# Altium PCB GROUND_MOTION.PCBDOC
Units mm, origin at the board's own origin, x right, y up, seen from the top; angles counter-clockwise.
Board outline 40 x 44.58 mm, 2 copper layers (Top Layer, Bottom Layer); 41 components, 0 nets, 162 pads, 57 vias.
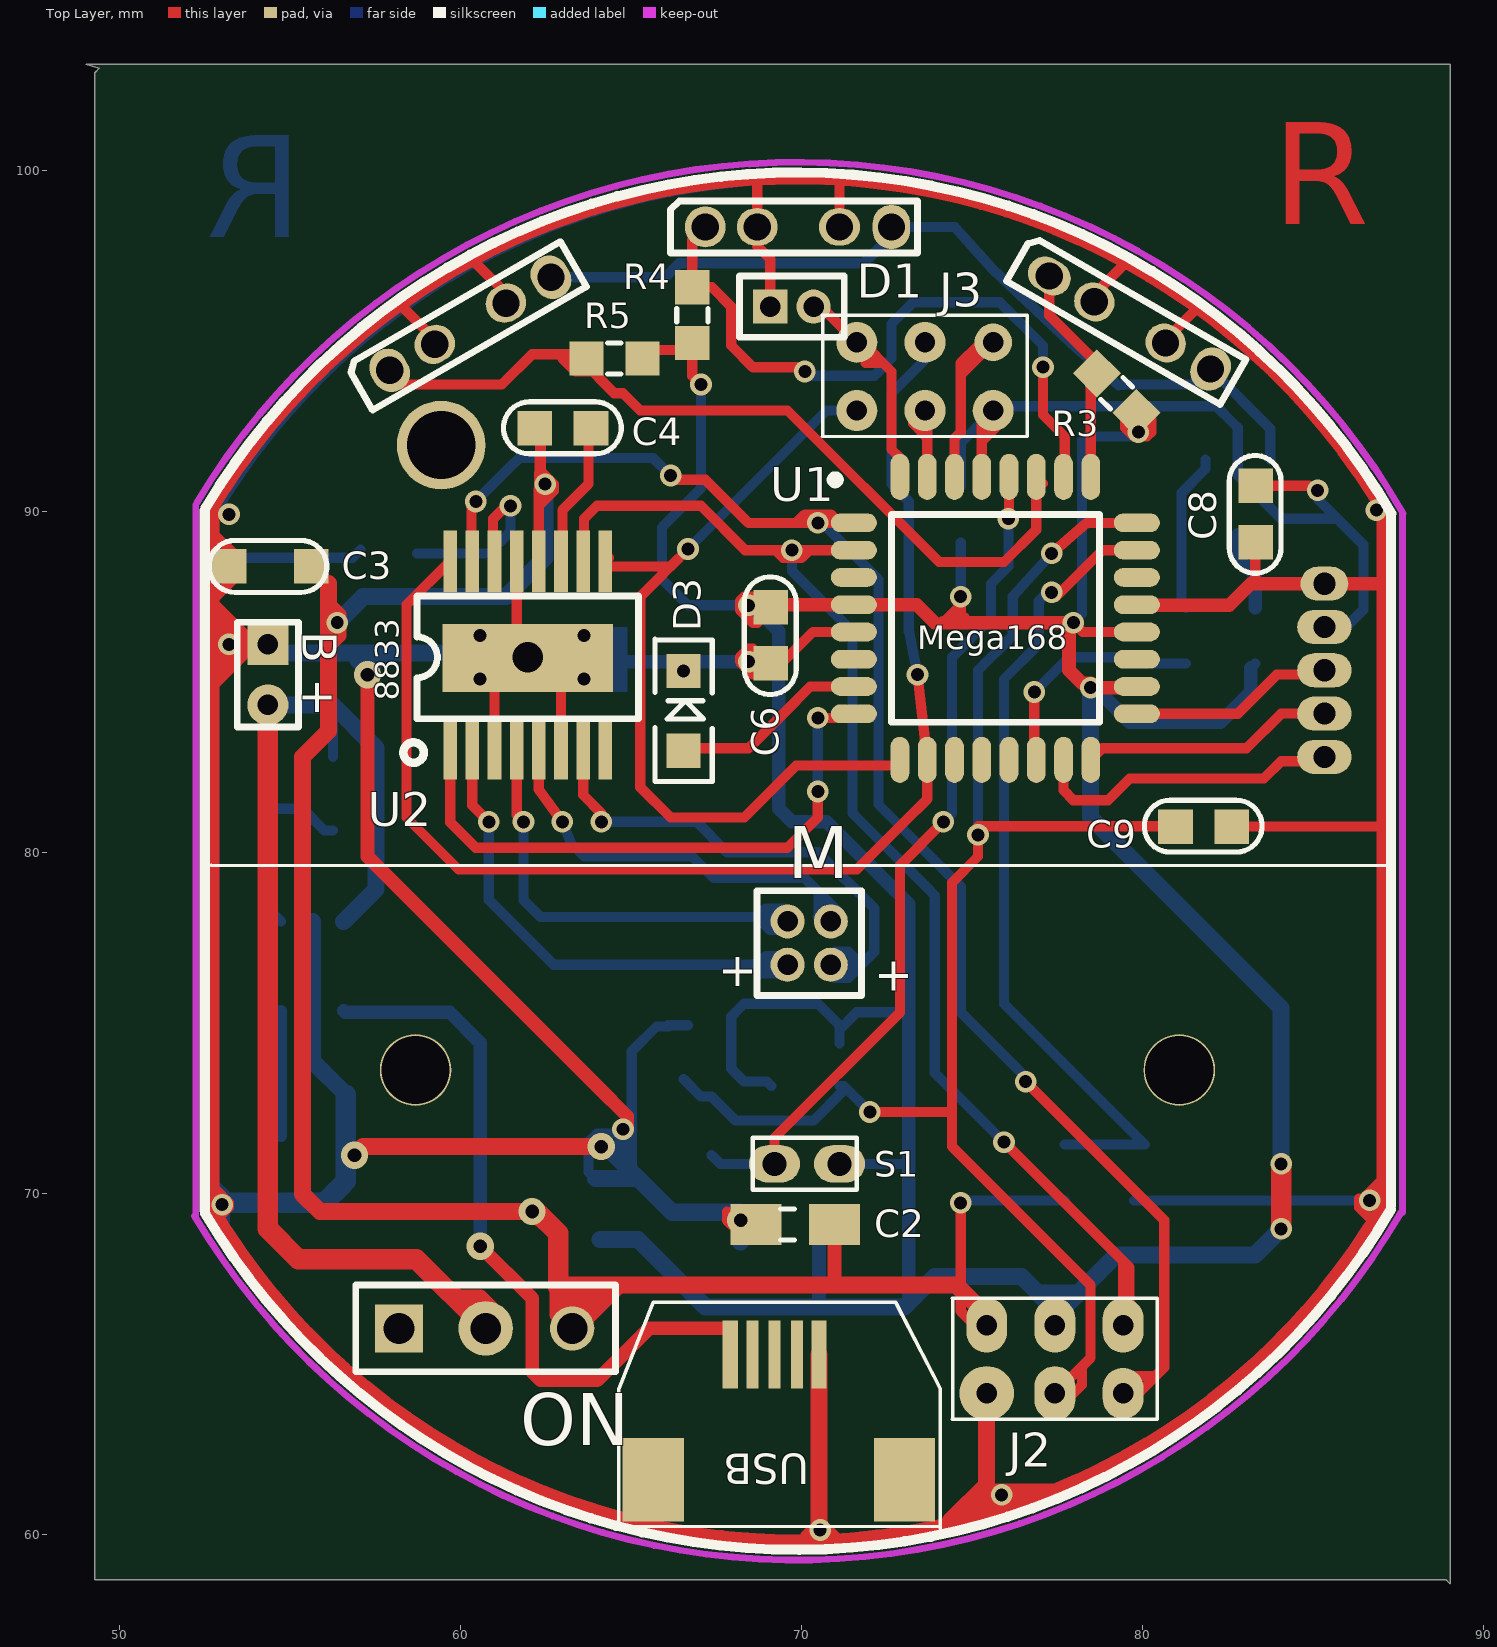
[diagram p0: Top Layer view]
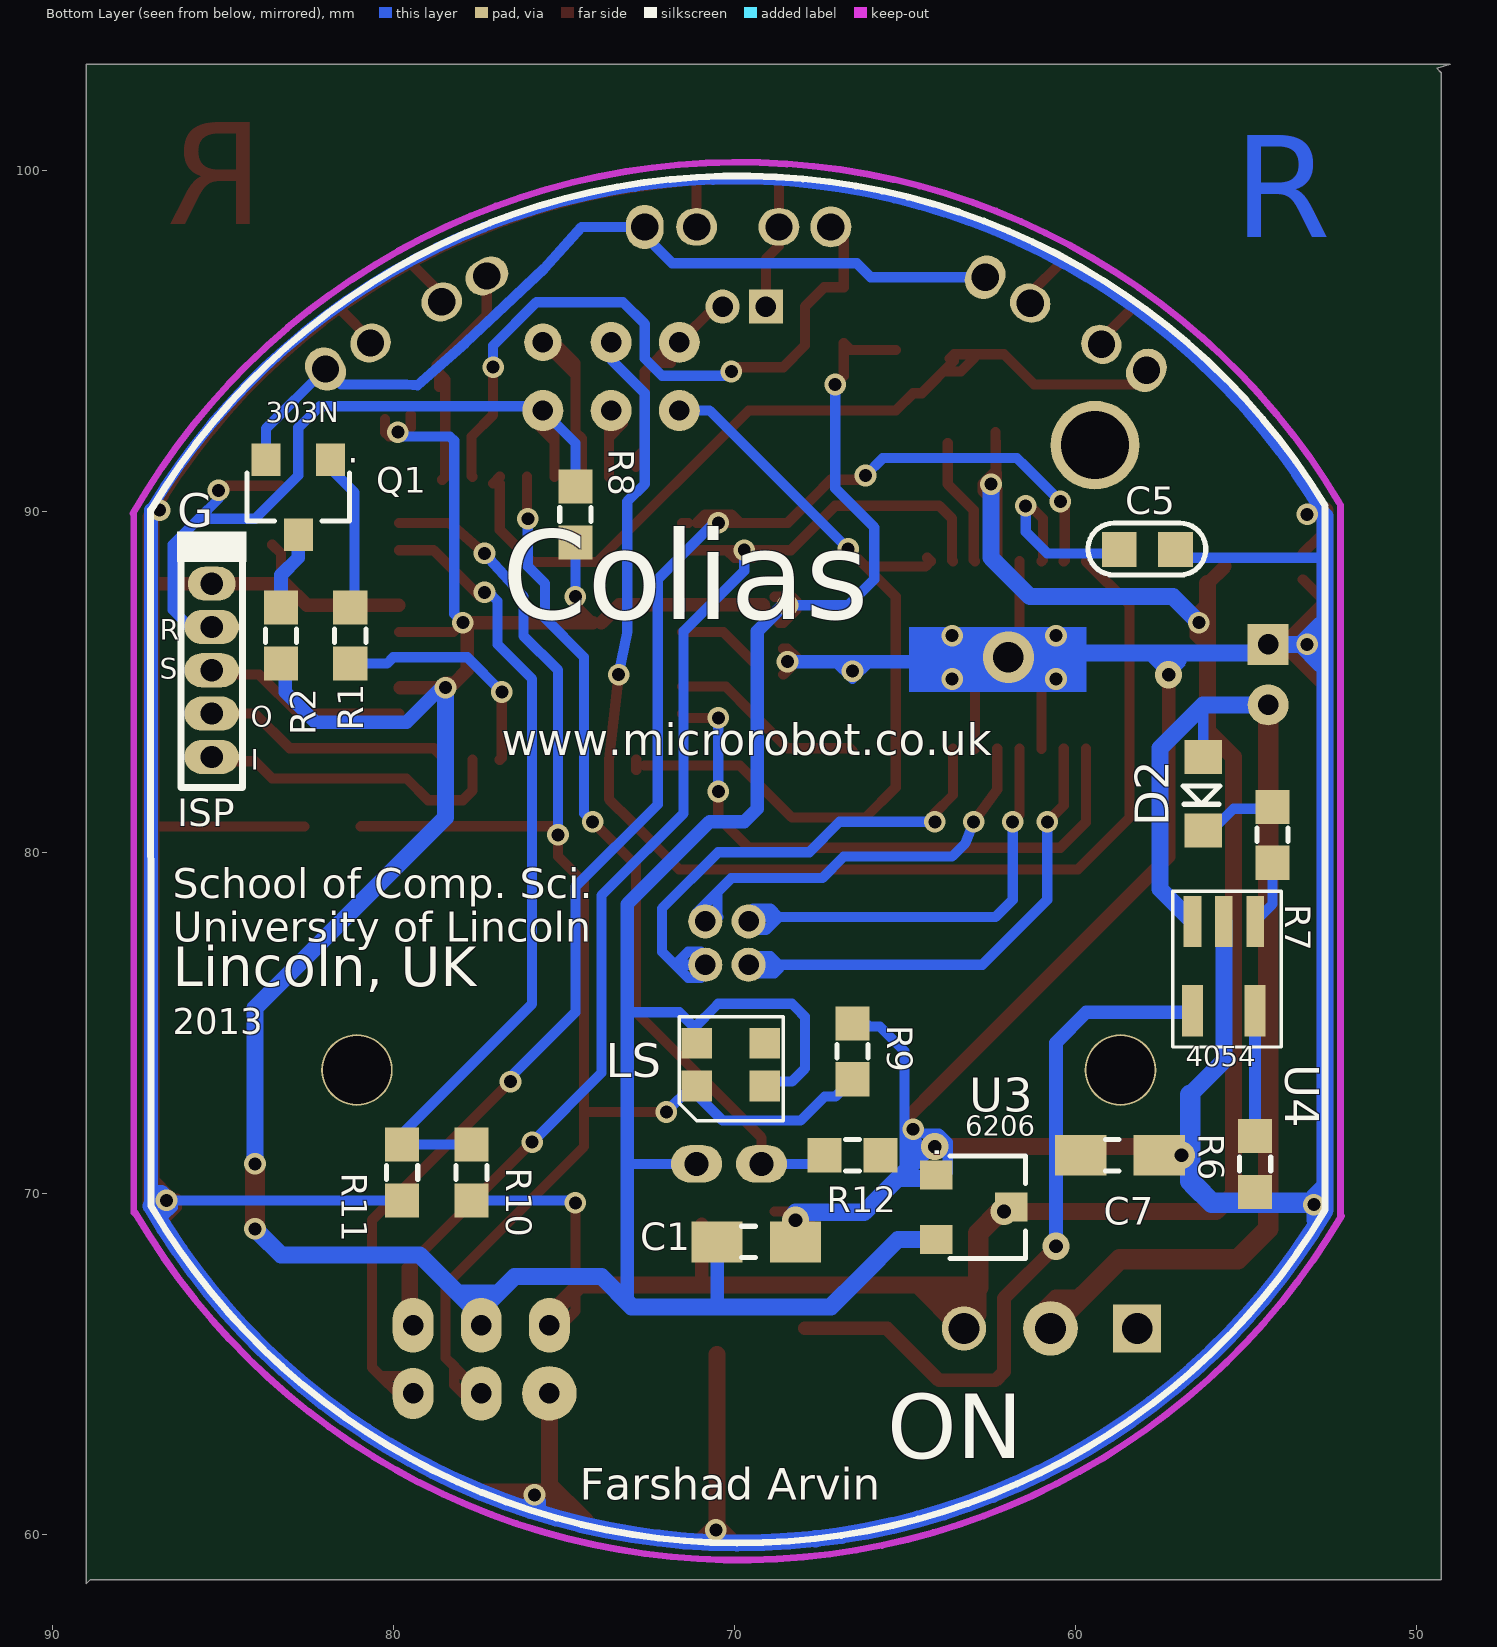
[diagram p1: Bottom Layer view, seen from below]

## Layer stack, top to bottom
Top Layer: signal copper 0.0356
Dielectric: dielectric 0.32, FR-4, Dk 4.8
Bottom Layer: signal copper 0.0356

## Board outline
49.403,102.997 49.276,102.87 49.276,58.674 88.9,58.674 89.027,58.547 89.027,103.124 49.022,103.124

## Design rules (kind name [scope] priority, off if disabled: settings)
Clearance [All] p1: gap=0.1
ComponentClearance [All] p1: gap=0.254 collisioncheckmode=3 verticalgap=0.254
PolygonConnect [All] p1: connectstyle=Relief reliefconductorwidth=0.254 reliefentries=4 polygonreliefangle="90 Angle"
RoutingVias [All] p1: holewidth=0.711 width=1.27 viastyle="Through Hole" minholewidth=0.711 minwidth=1.27 maxholewidth=0.711 maxwidth=1.27
SolderMaskExpansion [All] p1: expansion=0.102
TestPointUsage [All] p1: valid=0 allowmultiple=FALSE
Testpoint [All] p1: side=15 testpointundercomponent=TRUE minsize=1.016 maxsize=2.54 preferedsize=1.524 minholesize=0 maxholesize=1.016 preferedholesize=0.813 testpointgrid=0.025 style=1023 order=0-112345678
Width [All] p1: maxlimit=0.254 minlimit=0.254 preferedwidth=0.254
18 further rules are at their usual default settings.

## Components (designator, comment, footprint, x,y, rotation, side; value= is the part's Value field where it differs from the comment)
"B +" "Comment" MHDR1X2#1 54.356,85.852 r270 top
C1 "100nF 0603" C0603(1608) 69.596,68.58 r0 bottom (schematic designator C68)
C2 "100nF 0603" C0603(1608) 69.596,69.088 r180 top (schematic designator C68)
C3 "" 0603C#1 54.356,88.392 r0 top (schematic designator C14)
C4 "" 0603C#2 62.992,92.456 r0 top (schematic designator C14)
C5 "" 0603C#2 57.912,88.9 r180 bottom (schematic designator C14)
C6 "" 0603C#2 69.088,86.36 r90 top (schematic designator C14)
C7 "100nF 0603" C0603(1608) 58.928,71.12 r0 bottom (schematic designator C68)
C8 "" 0603C#2 83.312,89.916 r90 top (schematic designator C14)
C9 "" 0603C#2 81.788,80.772 r0 top (schematic designator C14)
D1 "Comment" MHDR1X2#2 69.088,96.012 r0 top
D2 "LED0" 0805L#1 56.261,83.058 r90 bottom (schematic designator D4)
D3 "LED0" 0805L#2 66.548,82.804 r270 top (schematic designator D4)
ISP "Comment" MHDR1X5 85.344,87.884 r270 bottom
J2 "Comment" DIP6-2mm#1 75.438,64.135 r90 top locked
J3 "Comment" DIP6-2mm#2 71.628,92.964 r90 top locked
LS "Comment" "SOP4 - duplicate" 71.12,73.152 r90 bottom
M "Comment" MHDR2X2 69.596,76.708 r0 top
ON "Comment" HDR1X3 58.2,66.04 r0 top
Q1 "FDV301N" SOT23#1 82.804,90.424 r0 bottom (schematic designator V48)
R1 "47ohm 0603" R0603(1608) 81.28,86.36 r270 bottom (schematic designator R46)
R2 "47ohm 0603" R0603(1608) 83.312,86.36 r270 bottom (schematic designator R46)
R3 "47ohm 0603" R0603(1608) 79.248,93.472 r135 top (schematic designator R46)
R4 "47ohm 0603" R0603(1608) 66.802,95.758 r90 top (schematic designator R46)
R5 "47ohm 0603" R0603(1608) 64.516,94.488 r0 top (schematic designator R46)
R6 "47ohm 0603" R0603(1608) 54.737,70.866 r90 bottom (schematic designator R46)
R7 "47ohm 0603" R0603(1608) 54.229,80.518 r90 bottom (schematic designator R46)
R8 "47ohm 0603" R0603(1608) 74.676,89.916 r90 bottom (schematic designator R46)
R9 "47ohm 0603" R0603(1608) 66.548,74.168 r90 bottom (schematic designator R46)
R10 "47ohm 0603" R0603(1608) 77.724,70.612 r90 bottom (schematic designator R46)
R11 "47ohm 0603" R0603(1608) 79.756,70.612 r90 bottom (schematic designator R46)
R12 "47ohm 0603" R0603(1608) 66.548,71.12 r0 bottom (schematic designator R46)
S1 "Comment" LED-1 70.104,72.644 r270 top
U1 "Comment" 32A_L 75.692,86.868 r0 top locked
U2 "Comment" SSOP16 61.976,85.725 r0 top
U3 "FDV301N" SOT23#2 62.992,69.596 r270 bottom (schematic designator V48)
U4 "Comment" LT5054 54.737,77.978 r270 bottom
? "Comment" "PCBComponent_1 - duplicate"#1 81.8,90.78 r330 top
? "Comment" "PCBComponent_1 - duplicate"#2 65.5,94.996 r30 top
? "Comment" DIP30 70.104,57.404 r90 top
? "Comment" "PCBComponent_1 - duplicate"#3 74.168,95.3 r0 top

## Footprints (in the part's own frame and the unit in brackets; to place one, negate y for a bottom-side part, rotate by r counter-clockwise, add the part's x,y. Pads: shape width x height; smd on the part's side, far side on the other; paste and mask are expansions set on the pad)
32A_L [mm] "Thin QFP, 32-Leads, Body 7x7mm, Pitch 0.8mm, IPC High Density"
  oval 1.35x0.55 smd: 1(-4.15,2.8) 2(-4.15,2) 3(-4.15,1.2) 4(-4.15,0.4) 5(-4.15,-0.4) 6(-4.15,-1.2) 7(-4.15,-2) 8(-4.15,-2.8) 17(4.15,-2.8) 18(4.15,-2) 19(4.15,-1.2) 20(4.15,-0.4) 21(4.15,0.4) 22(4.15,1.2) 23(4.15,2) 24(4.15,2.8)
  oval 0.55x1.35 smd: 9(-2.8,-4.15) 10(-2,-4.15) 11(-1.2,-4.15) 12(-0.4,-4.15) 13(0.4,-4.15) 14(1.2,-4.15) 15(2,-4.15) 16(2.8,-4.15) 25(2.8,4.15) 26(2,4.15) 27(1.2,4.15) 28(0.4,4.15) 29(-0.4,4.15) 30(-1.2,4.15) 31(-2,4.15) 32(-2.8,4.15)
  silkscreen extent -4.82,-3.05 3.05,4.19
0603C#1 [mil]
  rect 40x40 smd: 1(-45,0) 2(50,0)
  silkscreen extent -68,-30 68,30
0603C#2 [mil]
  rect 40x40 smd: 1(-32,-0.5) 2(33,-0.5)
  silkscreen extent -68,-30 68,30
0805L#1 [mm]
  rect 1x1.1 smd: 1(-0.254,0) 2(-2.413,0)
  silkscreen extent -1.64,-0.48 -1.11,0.58
0805L#2 [mm]
  rect 1x1 smd: 1(-0.18,0) 2(-2.514,0)
  silkscreen extent -3.45,-0.84 0.72,0.84
C0603(1608) [mm] "Chip Capacitor, Body 1.6x0.8mm, IPC Medium Density"
  rect 1.5x1.2 smd: 1(-1.376,0) 2(0.924,0)
  silkscreen extent -0.2,-0.46 0.2,0.46, body extent -0.85,-0.48 0.85,0.48, height 0.6
DIP6-2mm#1 [mm]
  oval 1.6x1.2 hole 0.6: "3.3 V"(2,-2) Bat(2,0) L-Dir(2,-4) Light(0,-2)
  round 1.6 hole 0.6: GND(0,0)
  oval 1.5x1.2 hole 0.6: R-Dir(0,-4)
  silkscreen extent -0.76,-5 2.79,1.02
DIP6-2mm#2 [mm]
  round 1.2 hole 0.6: LED(2,0) LPWM(0,0) RPWM(2,-2) RST(0,-4) TxD(0,-2)
  round 1.1 hole 0.6: RxD(2,-4)
  silkscreen extent -0.76,-5 2.79,1.02
DIP30 [mm]
  rect 2.45x1.8 smd: 0(4.191,4.445) 0(4.191,-2.921)
  rect 2x0.35 smd: " "(7.874,0.235) " "(7.874,0.885) ""(7.874,1.535)
  rect 2x0.45 smd: GND(7.874,-0.415) VDD(7.874,2.185)
  silkscreen extent 2.76,-3.98 9.4,5.46
HDR1X3 [mm] "Connector; Header; 3 Position"
  rect 1.4x1.4 hole 0.9: 1(0,0)
  round 1.6 hole 0.9: 2(2.54,0)
  round 1.3 hole 0.9: 3(5.08,0)
  silkscreen extent -1.27,-1.27 6.35,1.27
LED-1 [mm]
  oval 1.1x1.5 hole 0.7: 1(1.778,1.016) 2(1.778,-0.889)
  silkscreen extent 1.02,-1.52 2.54,1.52
LT5054 [mm]
  rect 1.5x0.518 smd: BAT(0,-1.84) GND(0,-0.92) LED(0,0)
  rect 1.5x0.62 smd: PROG(2.62,0) VCC(2.62,-1.84)
MHDR1X2#1 [mm] "Connector; Header; 2 Position"
  rect 1.2x1.2 hole 0.6: 1(-0.254,0)
  round 1.2 hole 0.6: 2(1.524,0)
  silkscreen extent -0.9,-0.9 2.17,0.9
MHDR1X2#2 [mm] "Connector; Header; 2 Position"
  rect 1x1 hole 0.6: 1(0,0)
  round 1 hole 0.6: 2(1.27,0)
  silkscreen extent -0.9,-0.9 2.17,0.9
MHDR1X5 [mm]
  oval 1x1.4 hole 0.65: GND(0,0)
  oval 1x1.6 hole 0.65: MISO(3.81,0) MOSI(5.08,0) RST(1.27,0) SCK(2.54,0)
  silkscreen extent -0.9,-0.9 5.98,0.9
MHDR2X2 [mm] "Connector; Header; 2x2 Position"
  round 1 hole 0.6: 1(0,0) 2(0,1.27) 3(1.27,0) 4(1.27,1.27)
  silkscreen extent -0.9,-0.9 2.17,2.17
"PCBComponent_1 - duplicate"#1 [mm]
  oval 1.1x1.3 hole 0.8: D-A(-1.524,3.048)
  oval 1.2x1.1 hole 0.8: D-C(-3.048,3.048) T-E(-5.461,3.048)
  oval 1.3x1 hole 0.8: T-C(-6.985,3.048)
  silkscreen extent -8,2.29 -0.76,3.81
"PCBComponent_1 - duplicate"#2 [mm]
  oval 1.1x1.3 hole 0.8: D-A(-1.524,3.048) T-C(-6.985,3.048)
  oval 1.2x1.1 hole 0.8: D-C(-3.048,3.048) T-E(-5.461,3.048)
  silkscreen extent -8,2.29 -0.76,3.81
"PCBComponent_1 - duplicate"#3 [mm]
  oval 1.1x1.3 hole 0.8: D-A(-1.524,3.048)
  oval 1.2x1.1 hole 0.8: D-C(-3.048,3.048) T-E(-5.461,3.048)
  round 1.2 hole 0.8: T-C(-6.985,3.048)
  silkscreen extent -8,2.29 -0.76,3.81
R0603(1608) [mm] "Chip Resistor, Body 1.6x0.8mm, IPC Medium Density"
  rect 1x1 smd: 1(-0.82,0) 2(0.82,0)
  silkscreen extent -0.2,-0.46 0.2,0.46, body extent -0.85,-0.48 0.85,0.48, height 0.6
"SOP4 - duplicate" [mm]
  rect 0.9x0.9 smd: 1(0,0) 2(1.25,0) 3(0,-2) 4(1.25,-2)
  silkscreen extent -1.02,-2.54 2.03,0.51
SOT23#1 [mm] "SOT23, 3-Leads, Body 2.9x1.3mm, Pitch 0.95mm, Lead Span 2.5mm, IPC Medium Density"
  rect 0.85x0.95 smd: Drain(0,1.1) Gate(-0.95,-1.1) S(0.95,-1.1)
  silkscreen extent -1.5,-0.7 1.5,0.7, body extent -1.5,-0.7 1.5,0.7, height 1.1
SOT23#2 [mm] "SOT23, 3-Leads, Body 2.9x1.3mm, Pitch 0.95mm, Lead Span 2.5mm, IPC Medium Density"
  rect 0.85x0.95 smd: GND(-0.95,-1.1) IN(0,1.1) OUT(0.95,-1.1)
  silkscreen extent -1.5,-0.7 1.5,1.52, body extent -1.5,-0.7 1.5,0.7, height 1.1
SSOP16 [mm] "SSOP; 16 Leads; Body Width 5.3 mm; Pitch 0.65 mm"
  rect 0.4x1.8 smd: 1(-2.275,-2.68) 2(-1.625,-2.68) 3(-0.975,-2.68) 4(-0.325,-2.68) 5(0.325,-2.68) 6(0.975,-2.68) 7(1.625,-2.68) 8(2.275,-2.68) 9(2.275,2.82) 10(1.625,2.82) 11(0.975,2.82) 12(0.325,2.82) 13(-0.325,2.82) 14(-0.975,2.82) 15(-1.625,2.82) 16(-2.275,2.82)
  silkscreen extent -3.65,-3.09 3.25,1.8

## Part data
C1 C2 C7: library part "Cap 100nF 0603", "Condensador Ceramico SMT Generico"
C3 C4 C5 C6 C8 C9: library part CAP, "Capacitor"
D2 D3: "Typical INFRARED GaAs LED"
Q1 U3: "N-Channel MOSFET, 0.22A, 25V Vgs=2.7V Rds(on)=5"
R1 R2 R3 R4 R5 R6 R7 R8 R9 R10 R11 R12: library part "R47 0603 5%", "Resistencia SMT Generica"
U1: library part ATmega8-16AC

## Free pads (board coordinates)
  rect 5x2 smd: 0(61.976,85.7)
  round 2.1 hole 2: 0(81.086,73.619) 1(58.686,73.619)
  round 2.6 hole 2: 3(59.436,91.948)

## Via types
v1: diameter 0.635, hole 0.381, Top Layer to Bottom Layer, 50 vias
v2: diameter 0.8, hole 0.4, Top Layer to Bottom Layer, 6 vias
v3: diameter 1.5, hole 0.9, Top Layer to Bottom Layer, 1 vias

## Nets (pads, with @x,y where several pads share a name; then routed paths per layer and width w, separated by ;. In a path a pad name is that pad's centre, name@x,y a point inside that pad or via, vN(x,y) a via of type N, cw(c..) or ccw(c..) an arc to the next point about the centre after c; other vN are vias at no path point)
pads on no net: "?. " "B +.1" "B +.2" "J2.3.3 V" ?. ?.0 ?.D-A ?.D-C ?.GND ?.T-C ?.T-E ?.VDD C1.1 C1.2 C2.1 C2.2 C3.1 C3.2 C4.1 C4.2 C5.1 C5.2 C6.1 C6.2 C7.1 C7.2 C8.1 C8.2 C9.1 C9.2 D1.1 D1.2 D2.1 D2.2 D3.1 D3.2 ISP.GND ISP.MISO ISP.MOSI ISP.RST ISP.SCK J2.Bat J2.GND J2.L-Dir J2.Light J2.R-Dir J3.LED J3.LPWM J3.RPWM J3.RST J3.RxD J3.TxD LS.1 LS.2 LS.3 LS.4 M.1 M.2 M.3 M.4 ON.1 ON.2 ON.3 Q1.Drain Q1.Gate Q1.S R1.1 R1.2 R2.1 R2.2 R3.1 R3.2 R4.1 R4.2 R5.1 R5.2 R6.1 R6.2 R7.1 R7.2 R8.1 R8.2 R9.1 R9.2 R10.1 R10.2 R11.1 R11.2 R12.1 R12.2 S1.1 S1.2 U1.1 U1.2 U1.3 U1.4 U1.5 U1.6 U1.7 U1.8 U1.9 U1.10 U1.11 U1.12 U1.13 U1.14 U1.15 U1.16 U1.17 U1.18 U1.19 U1.20 U1.21 U1.22 U1.23 U1.24 U1.25 U1.26 U1.27 U1.28 U1.29 U1.30 U1.31 U1.32 U2.1 U2.2 U2.3 U2.4 U2.5 U2.6 U2.7 U2.8 U2.9 U2.10 U2.11 U2.12 U2.13 U2.14 U2.15 U2.16 U3.GND U3.IN U3.OUT U4.BAT U4.GND U4.LED U4.PROG U4.VCC
copper on no net: | length 1157.2
  Top Layer w0.3: 52.686,70.231 52.705,70.231 53.213,69.723 53.213,69.596 52.959,69.342 ; 52.686,88.011 52.705,88.011 ; 52.686,89.789 52.705,89.789 ; 52.705,90.014 cw(c69.868,79.746) 87.131,89.845 ; 52.832,87.503 53.34,88.011 ; 52.832,89.281 53.34,88.773 ; 56.134,85.979 56.515,86.36 56.515,86.614 56.515,86.995 56.134,87.376 ; 57.927,94.143 57.927,93.965 58.166,93.726 61.214,93.726 62.103,94.615 63.569,94.615 63.696,94.488 ; 58.293,96.012 59.247,95.058 59.247,94.905 ; 59.701,83.045 59.701,80.888 60.452,80.137 69.596,80.137 70.485,81.026 v1(70.485,81.788) ; 59.701,88.545 58.42,87.264 58.42,81.026 59.944,79.502 71.628,79.502 73.025,80.899 73.692,81.566 73.692,82.718 v1(73.406,85.217) ; 60.351,83.045 60.351,81.381 v1(60.833,80.899) ; 60.351,88.545 60.325,88.571 60.325,90.17 v1(60.452,90.297) ; 60.389,97.346 61.336,96.398 61.336,96.112 ; 60.96,85.217 61.001,85.176 61.001,83.045 ; 61.001,88.545 60.96,88.586 60.96,89.789 61.341,90.17 v1(61.468,90.17) ; 61.595,86.487 61.651,86.543 61.651,88.545 ; 61.651,83.045 61.651,81.097 v1(61.849,80.899) ; 62.301,83.045 62.301,81.844 v1(62.992,80.899) ; 62.301,88.545 62.301,90.48 62.357,92.329 62.357,91.186 62.738,90.805 62.738,90.607 62.301,90.17 ; 62.865,66.675 63.571,66.675 63.704,66.808 ; 62.951,83.045 62.951,85.176 62.992,85.217 ; 62.951,88.545 62.992,88.586 62.992,90.043 63.754,90.805 63.754,92.011 ; 62.992,94.615 62.992,94.488 63.373,94.107 63.881,94.107 ; 63.569,94.419 64.516,93.472 64.77,93.472 65.278,92.964 69.596,92.964 74.041,88.519 75.946,88.519 76.892,89.465 76.892,89.789 76.892,90.821 ; 63.601,83.045 63.601,81.687 64.135,81.153 v1(64.135,80.899) ; 63.601,88.545 63.627,88.571 63.627,89.789 64.008,90.17 67.056,90.17 68.358,88.868 71.542,88.868 ; 64.352,88.646 64.251,88.545 64.277,88.519 64.404,88.392 66.167,88.392 v1(66.675,88.9) 65.278,87.503 65.278,81.915 66.167,81.026 68.326,81.026 69.85,82.55 72.644,82.55 ; 65.278,94.742 66.606,94.742 66.802,94.938 ; v1@66.167,90.932 67.183,90.932 67.691,90.424 68.447,89.668 71.114,89.668 70.866,89.916 70.104,89.916 69.856,89.668 69.85,89.668 ; 66.548,82.984 66.622,83.058 68.453,83.058 69.469,84.074 70.263,84.868 71.542,84.868 ; 66.802,94.869 66.802,94.938 ; v1@66.929,93.853 66.802,93.98 66.802,94.938 ; 67.183,98.348 66.802,97.967 66.802,96.578 67.379,96.578 67.945,96.012 67.945,94.869 68.58,94.234 69.977,94.234 v1(70.104,94.107) ; 67.818,69.469 67.818,69.215 v2@68.072,68.961 ; v2@68.072,69.469 68.834,69.469 ; 68.58,85.217 68.199,85.598 68.199,85.725 68.453,85.979 68.58,85.979 ; 68.707,86.741 68.58,86.741 68.199,87.122 68.199,87.376 68.326,87.503 68.834,87.503 ; 68.707,99.695 68.707,98.348 68.707,97.79 69.088,97.409 69.088,96.012 ; 69.088,88.868 69.247,88.868 69.469,88.646 69.977,88.646 70.009,88.646 70.231,88.868 ; 69.101,87.198 69.171,87.268 ; 69.215,70.866 69.215,71.628 72.898,75.311 72.898,79.629 v1(74.168,80.899) ; 69.342,85.471 70.339,86.468 71.542,86.468 ; 70.104,59.944 v1@70.519,60.359 ; 70.358,96.012 70.58,96.012 71.628,94.964 71.787,94.964 72.644,94.107 72.644,91.821 72.898,91.567 72.898,91.313 ; v1(70.485,83.947) 71.421,83.947 71.542,84.068 ; 70.519,60.452 v1@70.519,60.359 ; 70.993,59.944 70.578,60.359 v1@70.519,60.359 ; 71.12,98.348 71.12,99.695 ; 71.368,89.668 71.542,89.668 ; 71.882,94.361 72.39,94.361 ; v1(72.009,72.39) 74.422,72.39 ; 72.892,82.417 72.892,82.718 ; 73.279,92.837 73.279,92.583 73.692,92.17 73.692,92.075 ; 73.628,92.964 73.692,92.9 73.692,91.018 ; 74.168,86.741 74.676,87.249 74.549,87.122 ; 74.492,91.018 74.492,92.145 74.676,92.329 74.676,94.012 ; v1(74.676,69.723) 74.676,67.183 74.676,66.548 75.057,66.167 ; v1(74.676,87.503) 74.676,86.995 74.803,86.868 ; 75.057,60.579 75.438,60.96 ; 75.184,94.869 74.676,94.361 74.676,94.012 ; 75.292,91.018 75.292,92.628 75.628,92.964 ; 75.292,92.075 75.311,92.075 75.819,92.583 ; 75.438,61.087 75.438,60.96 ; 75.438,61.595 74.295,60.452 74.676,60.452 75.438,61.214 75.438,61.341 77.47,61.341 77.343,61.341 77.089,61.087 75.946,61.087 v1(75.874,61.159) ; 75.628,94.964 74.676,94.012 ; v1@75.819,71.628 79.438,68.009 ; 76.092,91.018 v1@76.092,89.808 ; 76.581,60.96 75.438,60.96 ; v1(76.581,73.279) 80.645,69.215 80.645,64.897 ; v1(76.835,84.709) 76.835,84.201 76.835,82.775 76.892,82.718 ; 76.892,91.018 77.089,90.821 ; 76.935,96.874 76.962,96.901 ; 77.089,93.345 v1(77.089,94.234) ; 77.089,93.472 77.089,93.218 77.089,92.837 77.724,92.202 77.724,91.05 77.692,91.018 ; 77.275,96.912 77.275,95.757 78.74,94.292 ; v1(77.343,88.773) 78.365,89.668 79.842,89.668 ; 77.438,64.135 78.486,65.183 ; v1@77.47,87.503 78.835,88.868 79.842,88.868 ; 77.692,82.718 77.692,81.82 77.978,81.534 78.994,81.534 79.629,82.169 82.328,82.169 83.566,82.169 84.074,82.677 85.217,82.677 85.344,82.804 ; 77.851,64.135 77.978,64.135 78.232,64.389 78.232,64.929 78.486,65.183 ; v1@78.003,86.741 v1(77.978,86.741) 78.251,86.468 79.842,86.468 ; v1(78.486,84.836) v1@78.486,84.963 ; 78.492,82.718 78.832,83.058 83.058,83.058 84.074,84.074 85.344,84.074 ; 78.492,91.446 78.492,91.018 ; 78.578,90.932 78.492,91.018 ; 78.595,96.15 78.595,96.375 79.502,97.282 ; 78.668,93.654 78.668,94.052 78.492,93.876 78.492,91.018 ; 79.438,66.135 79.438,68.009 ; 79.502,92.837 79.502,92.456 79.756,92.202 80.01,92.202 80.137,92.202 80.264,92.329 80.264,92.71 ; 79.629,63.881 80.645,64.897 ; 79.629,66.675 79.629,67.818 79.438,68.009 ; 79.756,64.643 80.391,64.643 80.645,64.897 ; 79.81,84.836 79.842,84.868 ; 79.842,84.068 82.798,84.068 83.947,85.217 85.217,85.217 85.344,85.344 ; 79.842,87.268 79.861,87.249 ; 80.684,94.944 80.684,95.035 81.534,95.885 ; 80.975,80.759 80.963,80.772 77.597,80.772 75.184,80.772 75.184,79.883 74.422,79.121 74.422,72.39 ; 82.626,80.759 87.109,80.759 87.122,80.772 ; 83.312,87.884 83.312,88.773 83.566,89.027 ; 83.325,90.754 84.887,90.754 v1@85.082,90.559 ; 86.741,69.215 86.36,69.596 86.36,69.85 86.487,69.85 87.122,70.485 ; 74.422,72.39 74.422,71.374 78.486,67.31 78.486,65.183 ; v1@76.092,89.808 v1(76.073,89.789) v1@76.092,89.808
  Top Layer w0.4: 55.626,88.392 56.134,87.884 ; v2(57.277,85.217) 57.277,79.883 64.008,73.152 64.897,72.263 v1@64.897,71.882 ; v2(60.579,68.453) 62.103,66.929 62.103,64.77 62.357,64.516 64.008,64.516 65.532,66.04 67.945,66.04 ; 69.171,87.268 73.387,87.268 73.914,86.741 ; 70.972,67.331 70.972,69.088 ; 74.168,86.741 v1(77.978,86.741) ; v1@78.003,86.741 77.851,86.639 77.851,85.344 78.232,84.963 v1@78.486,84.963 ; v1(78.486,84.836) 79.81,84.836 ; 79.861,87.249 82.55,87.249 83.185,87.884 ; 83.312,87.884 85.344,87.884 87.122,87.884
  Top Layer w0.5: 52.686,87.249 53.829,86.106 ; 52.686,90.024 52.686,69.509 ccw(c69.868,79.746) 87.122,69.631 87.122,89.845 ; v1@52.959,86.106 52.959,86.614 53.34,86.233 53.467,86.233 52.686,85.452 52.686,84.963 53.829,86.106 ; 56.134,87.884 56.134,83.566 55.372,82.804 55.372,69.977 55.88,69.469 v2(62.103,69.469) 62.865,68.811 ; v2(56.896,71.12) 57.15,71.374 v2(64.135,71.374) ; 59.944,66.929 60.579,66.929 61.087,66.421 ; 62.865,67.056 63.456,67.056 63.923,66.59 ; 62.865,67.24 62.865,66.455 63.28,66.04 63.373,66.04 64.643,67.31 ; 62.865,67.31 64.643,67.31 ; 63.754,66.929 64.135,67.31 64.643,67.31 ; v1@70.485,59.944 70.519,59.978 70.519,65.278 ; 74.549,67.31 64.643,67.31 ; 74.676,67.183 75.438,66.421 75.438,65.659 ; 75.438,64.135 75.438,60.833 75.565,60.706 ; 53.829,86.106 54.356,86.106 53.829,86.106
  Top Layer w0.6: 54.356,84.328 54.356,68.961 55.245,68.072 58.708,68.072 60.74,66.04 ; v2@62.23,69.469 62.865,68.834 ; 62.865,67.24 62.865,68.811 ; v1(84.074,68.961) v1(84.074,70.866)
  Bottom Layer w0.3: 52.686,70.231 52.832,70.231 53.086,69.977 53.086,69.215 ; 52.686,88.646 56.832,88.646 57.074,88.887 ; 52.73,89.842 cw(c69.995,79.746) v1@87.136,90.051 ; 54.229,79.698 54.229,78.486 54.737,77.978 ; 54.229,81.338 54.287,81.28 55.372,81.28 56.007,80.645 56.261,80.645 ; 56.261,82.804 56.261,84.074 ; 56.896,85.852 56.896,85.598 v2(57.277,85.217) 57.912,85.852 57.531,85.852 v2@57.15,85.471 ; 58.725,88.773 60.833,88.773 61.468,89.408 v1(61.468,90.17) ; v1(60.452,90.297) 61.468,91.313 61.722,91.567 65.659,91.567 v1(66.167,91.059) ; v1(60.833,80.899) 60.833,78.613 62.738,76.708 69.4,76.708 ; v1(61.849,80.899) 61.849,78.613 62.357,78.105 69.596,78.105 ; 62.656,96.874 66.013,96.874 66.421,97.282 71.832,97.282 72.898,98.348 ; v1(62.992,80.899) 63.246,80.264 63.627,79.883 66.802,79.883 67.437,79.248 70.104,79.248 71.12,78.232 ; 63.754,70.612 63.754,71.501 64.008,71.755 65.024,71.755 64.897,71.755 64.516,71.374 64.897,71.374 65.024,71.247 64.897,71.247 64.77,71.12 ; v1(64.135,80.899) 66.929,80.899 67.818,80.01 70.485,80.01 72.136,78.359 72.136,77.089 71.755,76.708 ; 65.108,70.546 65.024,70.63 65.024,74.168 65.752,74.896 66.133,74.896 66.098,74.93 66.675,74.93 ; 66.04,85.598 66.548,85.09 67.056,85.598 ; 66.548,73.348 67.056,72.84 67.368,72.84 68.072,72.136 70.358,72.136 71.247,73.025 ; v1(66.675,88.9) 70.739,92.964 71.628,92.964 ; v1(67.056,93.726) 67.056,90.678 65.913,89.535 65.913,88.011 66.675,87.249 v1(68.453,87.249) ; 67.368,71.12 67.622,70.866 69.215,70.866 ; 69.12,73.152 68.993,73.279 68.326,73.279 67.945,73.66 67.945,75.184 68.199,75.438 68.326,75.565 70.485,75.565 70.612,75.438 71.12,74.93 71.12,74.402 71.12,74.803 71.628,75.311 73.152,75.311 ; 69.342,76.454 68.834,76.454 68.707,76.581 68.707,76.708 68.961,76.962 69.469,76.962 ; 69.342,77.724 69.088,77.724 68.707,78.105 68.961,78.359 69.469,78.359 ; v1(69.723,88.868) 69.723,88.265 71.247,86.741 71.501,86.487 71.501,81.153 73.66,78.994 73.914,78.74 73.914,73.533 v1(75.946,71.501) ; v1(70.104,94.107) 70.231,93.98 72.136,93.98 72.644,94.488 72.644,95.504 73.279,96.139 75.819,96.139 77.089,94.869 77.089,94.488 v1(77.089,94.234) ; 70.485,59.817 70.555,59.887 v1(70.555,60.128) ; 70.485,78.105 70.506,78.126 70.506,78.846 ; v1(70.485,81.788) v1(70.485,83.947) ; v1(70.485,89.668) 70.606,89.668 72.263,88.011 72.263,81.407 74.676,78.994 74.676,75.311 v1@76.581,73.406 ; 70.866,76.708 71.755,76.708 ; 70.993,76.327 71.374,76.327 71.755,76.708 ; 70.993,77.089 71.374,77.089 71.755,76.708 ; 71.12,70.866 73.152,70.866 ; 71.12,73.152 71.247,73.152 v1(72.009,72.39) ; 72.644,98.348 74.499,98.348 75.591,97.129 77.902,94.945 79.304,93.706 79.629,93.726 80.391,93.726 81.549,93.726 82.004,94.182 83.754,92.432 83.754,91.524 ; v1(73.406,85.217) 73.152,86.487 73.152,90.297 72.644,90.805 72.644,93.472 73.628,94.456 73.628,94.964 ; v1(74.168,80.899) 74.422,81.153 74.422,85.725 75.565,86.868 75.565,87.884 76.073,88.392 v1(76.073,89.789) ; v1(74.676,69.723) 74.745,69.792 77.724,69.792 ; v1(74.676,87.503) 74.676,88.392 74.676,89.096 ; 74.676,90.736 74.676,92.012 75.628,92.964 75.755,93.091 82.169,93.091 82.677,92.583 82.804,92.456 82.804,91.059 84.074,89.789 85.725,89.789 ; v1(75.184,80.518) 75.184,85.344 76.2,86.36 76.2,87.503 v1(77.343,88.773) ; 75.692,60.833 75.692,60.977 v1(75.874,61.159) v1@76.073,60.96 ; v1(76.835,84.709) 77.851,85.725 80.015,85.725 80.2,85.54 81.28,85.54 ; 77.089,67.183 78.105,67.183 ; 77.216,66.929 77.851,66.929 ; 77.343,66.675 77.724,66.675 ; v1(77.343,87.63) 77.216,87.63 76.962,87.376 76.962,86.106 75.946,85.09 75.946,75.565 80.079,71.432 77.724,71.432 ; v1(77.978,86.741) 78.232,86.995 78.232,91.948 78.232,92.075 78.359,92.202 79.756,92.202 v1(79.883,92.329) ; 79.756,69.792 v1@86.961,69.792 ; 81.28,87.18 81.153,87.307 81.153,90.551 81.854,91.252 81.854,91.524 ; 83.185,85.413 83.312,85.54 ; v1(85.145,90.623) 85.145,90.369 85.725,89.789 ; 85.852,86.487 86.487,87.122 86.487,89.027 85.725,89.789 ; 87.122,69.631 v1@86.961,69.792 ; 87.122,70.104 86.799,70.104 ; 86.799,70.104 86.487,69.792 86.487,69.596 86.741,69.342 86.741,69.572 v1@86.961,69.792 ; 86.799,70.104 86.961,69.942 v1@86.961,69.792
  Bottom Layer w0.35: 54.737,71.686 54.737,75.358
  Bottom Layer w0.4: 52.832,85.471 53.467,86.106 52.832,86.741 ; 56.577,75.358 56.624,75.311 59.69,75.311 60.579,74.422 v2(60.579,68.453) ; 64.008,85.598 v1(68.453,85.598) ; 65.108,70.442 65.108,70.546 ; v1(68.453,87.249) 68.58,87.249 69.342,86.487 69.342,81.28 69.723,80.899 70.739,80.899 73.152,78.486 73.152,66.855 ; 70.52,66.675 70.52,68.834 ; v1@78.549,84.9 78.994,84.455 79.629,83.82 82.296,83.82 83.185,84.709 83.185,85.413 ; 82.804,89.324 82.804,88.646 83.312,88.138 83.312,87.18 ; 87.122,69.631 v1@87.122,90.051
  Bottom Layer w0.5: 52.686,86.106 54.356,86.106 ; 52.686,89.868 52.686,69.509 ccw(c69.868,79.746) 87.122,69.631 ; 54.356,84.074 54.61,84.328 56.261,84.328 57.531,83.058 57.531,78.932 56.577,77.978 ; 54.737,85.852 59.944,85.852 ; 55.657,77.978 55.657,73.883 56.642,72.898 ; v1(56.388,86.741) 57.15,87.503 61.341,87.503 62.484,88.646 v1(62.484,90.805) ; 63.965,70.442 65.108,70.442 ; 64.092,68.646 65.212,68.646 66.294,67.564 67.183,66.675 73.025,66.675 73.914,67.564 76.454,67.564 77.343,66.675 ; v2(64.135,71.374) 64.28,71.374 65.024,70.63 ; 65.108,70.546 66.206,69.448 68.22,69.448 68.22,68.58 ; 77.724,66.675 79.248,68.199 83.312,68.199 83.947,68.834 v1(84.074,68.961) ; v1(78.486,84.836) 78.486,81.026 84.074,75.438 v1(84.074,70.866)
  Bottom Layer w0.6: v1@52.94,69.723 56.007,69.723 56.515,70.231 56.642,70.358 56.642,72.898
  other v1: 53.014,69.668 86.669,69.795 64.77,71.882 60.579,85.09 63.627,85.09 66.548,85.318 53.213,86.106 60.579,86.36 63.627,86.36 53.213,89.916 86.868,90.043
  other v2: 68.22,69.215
  other v3: 61.976,85.725

## Keep-outs
Keep-Out Layer:
  lines w0.2: 52.205,69.34 ccw(c69.868,79.746) 87.589,69.44 ; 52.236,69.34 52.236,90.19 ; 52.276,90.27 cw(c69.868,79.746) 87.649,89.948 ; 87.63,69.44 87.63,89.936

## Other copper
Top Layer:
  text "R" at 83.82,98.425 h3
Bottom Layer:
  rectangle: 59.69,84.709 64.897,86.614
  text "R" at 55.372,98.044 h3

## Silkscreen, mask and mechanical layers (free items; w line width, h text height)
Top Overlay:
  lines w0.1: 52.686,79.629 87.122,79.619
  lines w0.3: 52.5,69.509 52.5,90.024 ; 52.514,69.407 ccw(c69.868,79.746) 87.294,69.53 ; 52.533,90.116 cw(c69.868,79.746) 87.304,89.946 ; 87.3,69.631 87.3,89.845
  text "Mega168" at 73.406,85.725 h1.2
  text "8833" at 58.42,84.455 h1.2 r90
Bottom Overlay:
  rectangle: 84.328,88.519 86.36,89.408
  lines w0.1: 53.975,74.295 57.15,74.295 57.15,78.867 53.975,78.867 53.975,74.295
  lines w0.2: 52.686,90.1 52.686,69.509 ccw(c69.868,79.746) 87.122,69.631 87.136,90.051 ; 52.688,90.18 cw(c69.868,79.746) 87.128,90.047
  text "303N" at 83.754,92.432 h1
  text "G" at 86.36,89.535 h1
  text "R" at 86.868,86.233 h0.6
  text "Colias" at 76.835,85.979 h4.5
  text "S" at 86.868,85.09 h0.6
  text "O" at 84.201,83.693 h0.6
  text "www.microrobot.co.uk" at 76.835,82.55 h1.6
  text "I" at 84.201,82.423 h0.6
  text "School of Comp. Sci." at 86.487,78.359 h1.5
  text "University of Lincoln" at 86.487,77.089 h1.5
  text "Lincoln, UK" at 86.487,75.692 h2
  text "2013" at 86.487,74.422 h1.3
  text "4054" at 56.769,73.533 h1
  text "6206" at 63.246,71.501 h1
  text "ON" at 65.532,62.23 h1.9
  text "Farshad Arvin" at 74.549,60.706 h1.6
Mechanical 1:
  lines w0.1: 53.848,67.619 85.725,67.619

## Text inside footprints (layer, text, board x,y; h text height)
M: Top Overlay "+" at 67.564,76.073 h1; Top Overlay "+" at 72.136,75.946 h1
?: Top Overlay "USB" at 70.231,62.357 h0.9 r180